# EAGLE board UVTrack - Código (EAGLE 9.7.0)

Size 196.16 x 125.68 mm. Coordinates in mm from the lower left corner, seen from the top.
Outline: 0,0 196.16,0 196.16,125.68 0,125.68 0,0
Copper layers (1*16): Top 0.035mm / dielectric 1.5mm / Bottom 0.035mm
Design rules "default": minimum track width 6mil, minimum drill 0.35mm, track to track 6mil, track to pad 6mil, pad to pad 6mil, via to via 6mil, smd to smd 6mil, copper to edge 40mil, drill to drill 6mil, minimum pad ring 10mil, minimum via ring 8mil, stop-mask expansion 4mil, vias tented up to drill 0mil, thermal gap 10mil

## Footprints (pad centres in the part's own frame; a part is rotated, then mirrored left to right if it is on the bottom)
LEDRD254W60D565H860B = drill 0.981 pad 1.581: 1 -1.27,0; 2 1.27,0
MOTOR = drill 1.118 pad 3.15 octagon: + 2.54,0; - -2.54,0
TO220V = drill 1.016 long: 1 -2.54,-2.54; 2 0,-2.54; 3 2.54,-2.54
SENRD254W50D503H320B = drill 0.7 pad 1.3: 1 -1.27,0; 2 1.27,0
RESAD1016W63L850D250B = drill 0.83 pad 1.43: 1 -5.08,0; 2 5.08,0
GL5528 = drill 0.8 pad 1.4: 1 -1.702,0; 2 1.702,0
ARDUINO-UNO-R3-SHIELD = drill 1.016 pad 1.88: 3.3V 24.13,-2.54; 5V 24.13,0; A0 24.13,12.7; A1 24.13,15.24; A2 24.13,17.78; A3 24.13,20.32; A4 24.13,22.86; A5 24.13,25.4; AREF -24.13,-13.97; D2 -24.13,20.32; D3 -24.13,17.78; D4 -24.13,15.24; D5 -24.13,12.7; D6 -24.13,10.16; D7 -24.13,7.62; D8 -24.13,3.81; D9 -24.13,1.27; D10 -24.13,-1.27; D11 -24.13,-3.81; D12 -24.13,-6.35; D13 -24.13,-8.89; GND@0 24.13,2.54; GND@1 24.13,5.08; GND@2 -24.13,-11.43; IOREF 24.13,-7.62; NC 24.13,-10.16; RES 24.13,-5.08; RX -24.13,25.4; SCL -24.13,-19.05; SDA -24.13,-16.51; TX -24.13,22.86; VIN 24.13,7.62
TO92 = drill 0.813 octagon: 1 -1.27,0; 2 0,1.905; 3 1.27,0

## Placement (x,y rotation side)
DLED_ARDUINO_LILYPAD_-_ALERTAR_PERIGO  RED  [LEDRD254W60D565H860B]  150.57,79.47 180 top
MMÓDULO_SIMULADOR_DE_VIBRAÇÃO  MOTOR_HDR  [MOTOR]  30.65,117.43 90 top
QINTERRUPTOR_ELETRÔNICO  TIP120_TO220-V  [TO220V]  28.58,86.13 270 top
QLEITURA_UV_VIA_SENSOR_BME280)  PHOTOTRANSISTOR  [SENRD254W50D503H320B]  190.41,93.61 0 top
RBASE_DO_INTERRUPTOR_(TRANSISTOR_NPN)  220  [RESAD1016W63L850D250B]  130.8,32.67 90 top
RDIVISOR_DE_TENSÃO  10k  [RESAD1016W63L850D250B]  6.33,58.36 270 top
RRESISTOR_CATÓDICO_LED  220  [RESAD1016W63L850D250B]  149.3,72.43 90 top
RRESISTOR_PULL-UP  10k  [RESAD1016W63L850D250B]  185.52,6.33 0 top
RRESISTOR_ÂNODO_LED  220  [RESAD1016W63L850D250B]  152.62,72.34 270 top
RSENSOR_UV_ML8511  PHOTOCELL_GL5528  [GL5528]  12.93,67.61 0 top
ULILYPAD_VIRTUAL  ARDUINO-UNO-R3-SHIELD  [ARDUINO-UNO-R3-SHIELD]  86.38,55.99 180 top
UTEMPERATURA_DO_SENSOR_BME280  TMP36GT9Z_TO92  [TO92]  157.67,46.29 0 top

## Library data of the parts
DLED_ARDUINO_LILYPAD_-_ALERTAR_PERIGO = Tinkercad; CATEGORY: Opto-Electronic; SUB-CATEGORY: LED; VALUE: LED_RED
MMÓDULO_SIMULADOR_DE_VIBRAÇÃO QINTERRUPTOR_ELETRÔNICO QLEITURA_UV_VIA_SENSOR_BME280) RBASE_DO_INTERRUPTOR_(TRANSISTOR_NPN) RDIVISOR_DE_TENSÃO RRESISTOR_CATÓDICO_LED RRESISTOR_PULL-UP RRESISTOR_ÂNODO_LED RSENSOR_UV_ML8511 ULILYPAD_VIRTUAL UTEMPERATURA_DO_SENSOR_BME280 = Tinkercad

## Nets
DLED_ARDUINO_LILYPAD_-_ALERTAR_PERIGO_A: DLED_ARDUINO_LILYPAD_-_ALERTAR_PERIGO.1 RRESISTOR_ÂNODO_LED.1
DLED_ARDUINO_LILYPAD_-_ALERTAR_PERIGO_C: DLED_ARDUINO_LILYPAD_-_ALERTAR_PERIGO.2 RRESISTOR_CATÓDICO_LED.2
MMÓDULO_SIMULADOR_DE_VIBRAÇÃO_-: MMÓDULO_SIMULADOR_DE_VIBRAÇÃO.- QINTERRUPTOR_ELETRÔNICO.2
QINTERRUPTOR_ELETRÔNICO_B: QINTERRUPTOR_ELETRÔNICO.1 RBASE_DO_INTERRUPTOR_(TRANSISTOR_NPN).1
QLEITURA_UV_VIA_SENSOR_BME280)_C: QLEITURA_UV_VIA_SENSOR_BME280).2 RRESISTOR_PULL-UP.2
ULILYPAD_VIRTUAL_5V: MMÓDULO_SIMULADOR_DE_VIBRAÇÃO.+ RSENSOR_UV_ML8511.1 ULILYPAD_VIRTUAL.5V
ULILYPAD_VIRTUAL_A0: RDIVISOR_DE_TENSÃO.1 RSENSOR_UV_ML8511.2 ULILYPAD_VIRTUAL.A0
ULILYPAD_VIRTUAL_A1: ULILYPAD_VIRTUAL.A1 UTEMPERATURA_DO_SENSOR_BME280.2
ULILYPAD_VIRTUAL_A2: RRESISTOR_PULL-UP.1 ULILYPAD_VIRTUAL.A2
ULILYPAD_VIRTUAL_D3: RBASE_DO_INTERRUPTOR_(TRANSISTOR_NPN).2 ULILYPAD_VIRTUAL.D3
ULILYPAD_VIRTUAL_D5: ULILYPAD_VIRTUAL.D5 UTEMPERATURA_DO_SENSOR_BME280.3
ULILYPAD_VIRTUAL_D13: RRESISTOR_ÂNODO_LED.2 ULILYPAD_VIRTUAL.D13
ULILYPAD_VIRTUAL_GND: QINTERRUPTOR_ELETRÔNICO.3 QLEITURA_UV_VIA_SENSOR_BME280).1 RDIVISOR_DE_TENSÃO.2 RRESISTOR_CATÓDICO_LED.1 ULILYPAD_VIRTUAL.GND@0 ULILYPAD_VIRTUAL.GND@1 ULILYPAD_VIRTUAL.GND@2 UTEMPERATURA_DO_SENSOR_BME280.1

## Tracks (layer width: path | path; a pad name or v marks a point on that pad's centre or on a via)
DLED_ARDUINO_LILYPAD_-_ALERTAR_PERIGO_A  (1 unrouted)
DLED_ARDUINO_LILYPAD_-_ALERTAR_PERIGO_C  (1 unrouted)
MMÓDULO_SIMULADOR_DE_VIBRAÇÃO_-  (1 unrouted)
QINTERRUPTOR_ELETRÔNICO_B  (1 unrouted)
QLEITURA_UV_VIA_SENSOR_BME280)_C  (1 unrouted)
ULILYPAD_VIRTUAL_5V  (2 unrouted)
ULILYPAD_VIRTUAL_A0  (2 unrouted)
ULILYPAD_VIRTUAL_A1  (1 unrouted)
ULILYPAD_VIRTUAL_A2  (1 unrouted)
ULILYPAD_VIRTUAL_D3  (1 unrouted)
ULILYPAD_VIRTUAL_D5  (1 unrouted)
ULILYPAD_VIRTUAL_D13  (1 unrouted)
ULILYPAD_VIRTUAL_GND  (7 unrouted)